# Altium PCB 声音传感器.PcbDoc
Units mm, origin at the board's own origin, x right, y up, seen from the top; angles counter-clockwise.
Board outline 152.4 x 101.6 mm, 2 copper layers (Top Layer, Bottom Layer); 14 components, 8 nets, 41 pads, 3 vias.
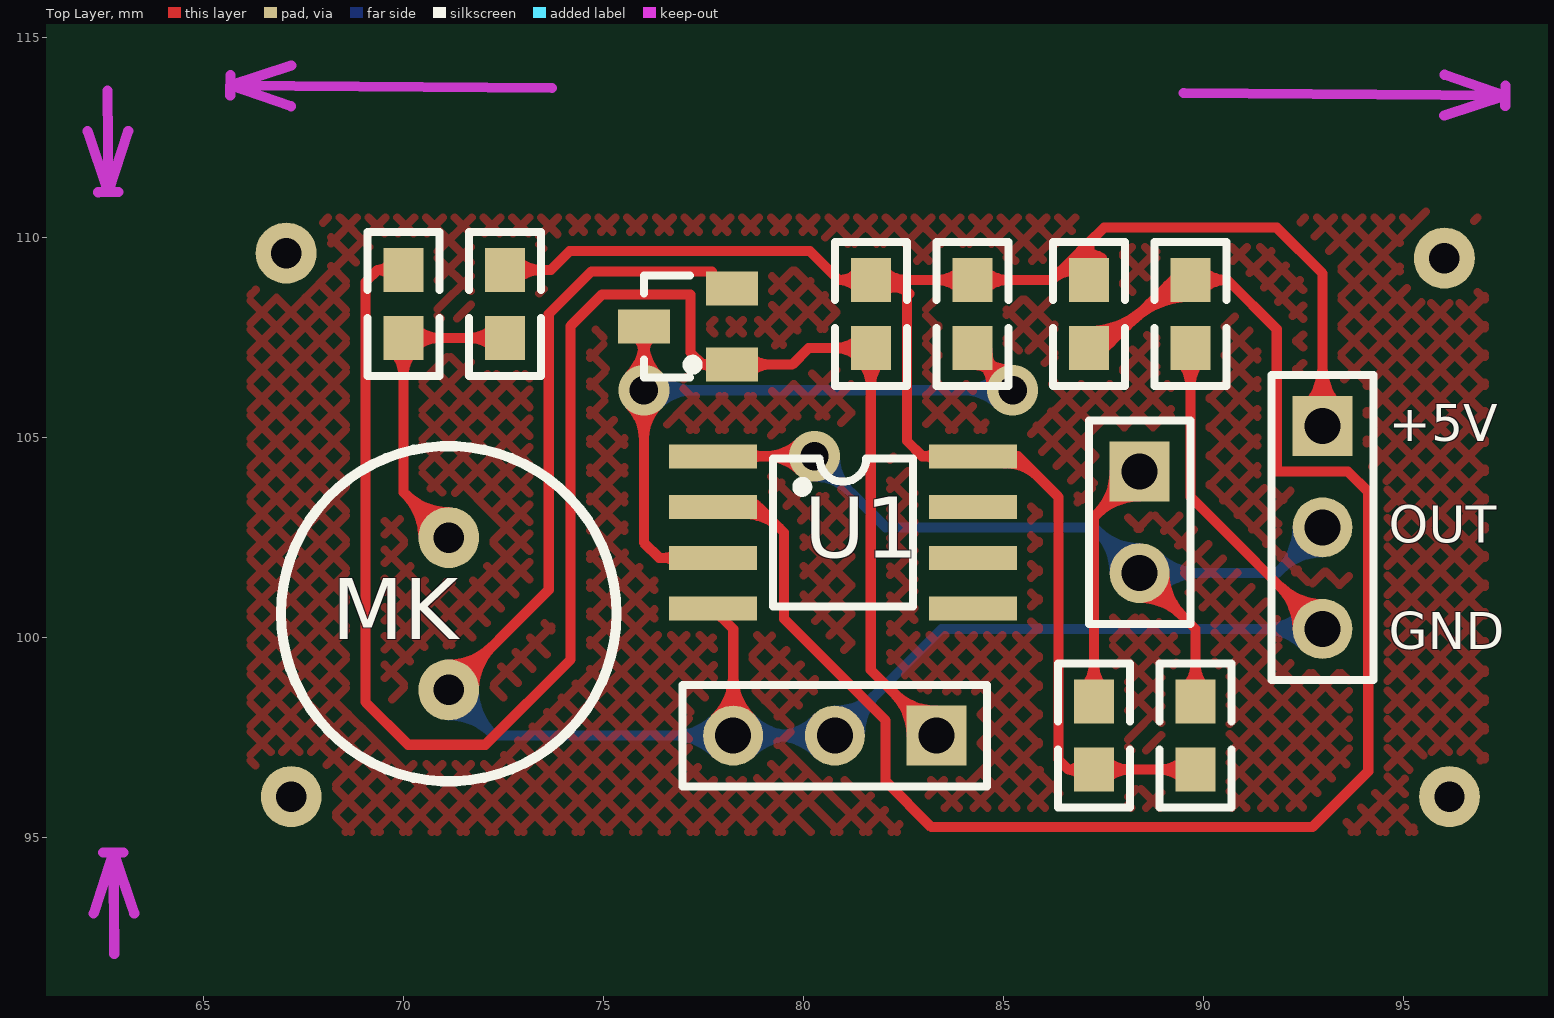
[diagram p0: Top Layer view]
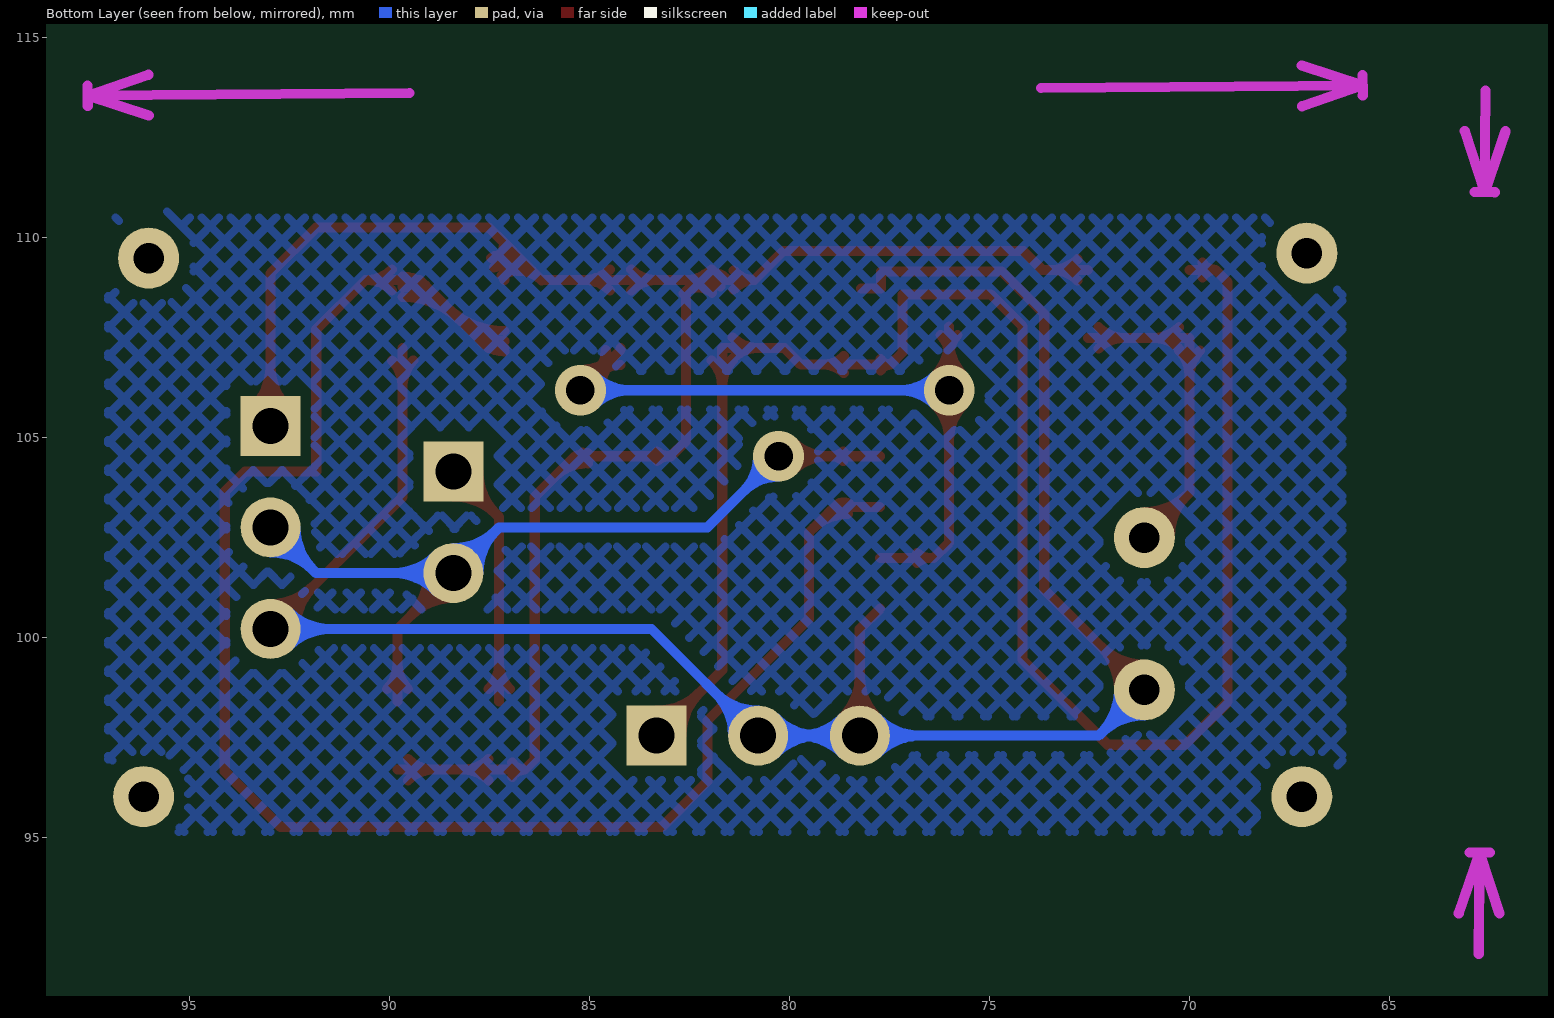
[diagram p1: Bottom Layer view, seen from below]

## Layer stack, top to bottom
Top Layer: signal copper 0.0356
Dielectric: dielectric 0.32, FR-4, Dk 4.8
Bottom Layer: signal copper 0.0356

## Board outline
25.4,25.4 177.8,25.4 177.8,127 25.4,127

## Design rules (kind name [scope] priority, off if disabled: settings)
Clearance [All] p1: gap=0.254
ComponentClearance [All] p1: gap=0.254 collisioncheckmode=3 verticalgap=0.254
PolygonConnect [All] p1: connectstyle=Relief reliefconductorwidth=0.254 reliefentries=4 polygonreliefangle="90 Angle"
RoutingVias [All] p1: holewidth=0.711 width=1.27 viastyle="Through Hole" minholewidth=0.711 minwidth=1.27 maxholewidth=0.711 maxwidth=1.27
SolderMaskExpansion [All] p1: expansion=0.102
TestPointUsage [All] p1: valid=0 allowmultiple=FALSE
Testpoint [All] p1: side=15 testpointundercomponent=TRUE minsize=1.016 maxsize=2.54 preferedsize=1.524 minholesize=0 maxholesize=1.016 preferedholesize=0.813 testpointgrid=0.025 style=1023 order=0-112345678
Width [All] p1: maxlimit=0.254 minlimit=0.254 preferedwidth=0.254
17 further rules are at their usual default settings.

## Classes and differential pairs
component class 声音传感器: +5V MK U1 ""

## Components (designator, comment, footprint, x,y, rotation, side; value= is the part's Value field where it differs from the comment)
+5V "Header 3" HDR1X3 92.964,105.283 r270 top (schematic designator JP1)
C1 "" C1608-0603 69.988,108.331 r90 top
LED1 "" HDR1X2 88.392,104.14 r270 top
MK "" MK 66.04,108.204 r270 top
Q1 "NPN" SO-G3 77.216,108.712 r90 top
R1 "" C1608-0603 72.528,108.331 r90 top
R2 "" C1608-0603 81.672,108.077 r90 top
R3 "" C1608-0603 84.212,108.077 r90 top
R4 "" C1608-0603 87.122,108.077 r90 top
R5 "" C1608-0603 89.662,108.077 r90 top
R6 "" C1608-0603 89.789,97.536 r90 top
R7 "" C1608-0603 87.249,97.536 r90 top
Rp "" HDR1X3 83.312,97.536 r180 top
U1 "LM393AD" CDFP-8 77.216,100.076 r270 top

## Footprints (in the part's own frame and the unit in brackets; to place one, negate y for a bottom-side part, rotate by r counter-clockwise, add the part's x,y. Pads: shape width x height; smd on the part's side, far side on the other; paste and mask are expansions set on the pad)
C1608-0603 [mm] "Chip Resistor; Body 1.6 x 0.8 mm (LxW typ)"
  rect 1.1x1 smd: 1(-0.85,0) 2(0.85,0)
  silkscreen extent -1.8,-0.9 1.8,0.9
CDFP-8 [mm]
  rect 0.6x2.2 smd: 1(-4.445,0.508) 2(-3.175,0.508) 3(-1.905,0.508) 4(-0.635,0.508) 5(-0.635,7.008) 6(-1.905,7.008) 7(-3.175,7.008) 8(-4.445,7.008)
  silkscreen extent -4.39,2.01 -0.69,5.51
HDR1X2 [mm] "Connector; Header; 2 Position"
  rect 1.5x1.5 hole 0.9: 1(0,0)
  round 1.5 hole 0.9: 2(2.54,0)
  silkscreen extent -1.27,-1.27 3.81,1.27
HDR1X3 [mm] "Connector; Header; 3 Position"
  rect 1.5x1.5 hole 0.9: 1(0,0)
  round 1.5 hole 0.9: 2(2.54,0) 3(5.08,0)
  silkscreen extent -1.27,-1.27 6.35,1.27
MK [mil]
  round 60 hole 30: 1(225,200) 2(375,200)
  silkscreen extent 135,35 465,365
SO-G3 [mm] "SOT-23; 3 Leads; Body 3.0 x 2.6 mm, inc. leads (LxW max)"
  rect 0.85x1.3 smd: 1(-1.9,-0.983) 2(0,-0.983) 3(-0.95,1.217)
  silkscreen extent -2.23,-0.13 0.32,1.22

## Part data
+5V: "Header, 3-Pin"
C1: library part "Cap Semi", "Capacitor (Semiconductor SIM Model)"
LED1: library part LED3, "Typical BLUE SiC LED"
MK: library part Motor, "Motor, General Kind"
Q1: "NPN Bipolar Transistor"
R1 R2 R3 R4 R5 R6 R7: library part Res2, "Resistor"
Rp: library part RPot, "Potentiometer"
U1: "Low-Power Dual Voltage Comparator"

## Free pads (board coordinates)
  round 1.524 hole 0.762: 3(67.056,109.601) 4(67.183,96.012) 5(96.012,109.474) 6(96.139,96.012)

## Via types
v1: diameter 1.27, hole 0.711, Top Layer to Bottom Layer, 3 vias

## Nets (pads, with @x,y where several pads share a name; then routed paths per layer and width w, separated by ;. In a path a pad name is that pad's centre, name@x,y a point inside that pad or via, vN(x,y) a via of type N, cw(c..) or ccw(c..) an arc to the next point about the centre after c; other vN are vias at no path point)
GND: +5V.3 MK.2 Q1.2 R5.1 Rp.2 Rp.3 U1.4 | length 86.5
  Top Layer w0.254: MK.2 73.622,101.181 73.622,108.077 74.688,109.144 77.699,109.144 77.699,108.712 Q1.2 ; MK.2@71.12,99.06 ccw(c71.12,99.98) 71.77,99.329 ccw(c72.421,98.679) MK.2@71.501,98.679 ; MK.2@71.12,99.314 ccw(c71.12,100.847) 72.204,99.763 ccw(c73.288,98.679) MK.2@71.755,98.679 ; U1.4 78.232,100.203 Rp.3 ; Rp.3@77.791,97.977 ccw(c76.728,99.04) 78.232,99.04 ccw(c79.736,99.04) Rp.3@78.673,97.977 ; Rp.3@77.971,97.797 ccw(c77.341,98.427) 78.232,98.427 ccw(c79.123,98.427) Rp.3@78.493,97.797 ; R5.1@89.398,106.913 cw(c88.762,106.277) 89.662,106.277 cw(c90.562,106.277) R5.1@89.926,106.913 ; R5.1 89.662,103.505 +5V.3 ; +5V.3@92.341,100.203 ccw(c90.837,100.203) 91.9,101.267 ccw(c92.964,102.33) +5V.3@92.964,100.826 ; +5V.3@92.595,100.203 ccw(c91.704,100.203) 92.334,100.833 ccw(c92.964,101.463) +5V.3@92.964,100.572
  Bottom Layer w0.254: MK.2@71.12,98.044 cw(c71.12,96.511) 72.204,97.595 cw(c73.288,98.679) MK.2@71.755,98.679 ; MK.2@71.12,98.298 cw(c71.12,97.378) 71.77,98.029 cw(c72.421,98.679) MK.2@71.501,98.679 ; MK.2 72.263,97.536 Rp.3 Rp.2 83.439,100.203 +5V.3 ; Rp.3@77.791,97.095 ccw(c76.728,96.032) 76.728,97.536 ccw(c76.728,99.04) Rp.3@77.791,97.977 ; Rp.3@77.971,97.275 ccw(c77.341,96.645) 77.341,97.536 ccw(c77.341,98.427) Rp.3@77.971,97.797 ; Rp.3@78.493,97.275 cw(c79.123,96.645) 79.123,97.536 cw(c79.123,98.427) Rp.3@78.493,97.797 ; Rp.3@78.673,97.095 cw(c79.736,96.032) 79.736,97.536 cw(c79.736,99.04) Rp.3@78.673,97.977 ; Rp.2@80.331,97.095 ccw(c79.268,96.032) 79.268,97.536 ccw(c79.268,99.04) Rp.2@80.331,97.977 ; Rp.2@80.511,97.275 ccw(c79.881,96.645) 79.881,97.536 ccw(c79.881,98.427) Rp.2@80.511,97.797 ; Rp.2@80.772,97.905 ccw(c80.772,98.796) 81.402,98.166 ccw(c82.032,97.536) Rp.2@81.141,97.536 ; Rp.2@80.772,98.159 ccw(c80.772,99.663) 81.836,98.6 ccw(c82.899,97.536) Rp.2@81.395,97.536 ; +5V.3@92.523,99.762 ccw(c91.46,98.699) 91.46,100.203 ccw(c91.46,101.707) +5V.3@92.523,100.644 ; +5V.3@92.703,99.942 ccw(c92.073,99.312) 92.073,100.203 ccw(c92.073,101.094) +5V.3@92.703,100.464
NetC1_1: C1.1 MK.1 R1.1 | length 16.1
  Top Layer w0.254: C1.1@69.724,107.167 cw(c69.088,106.531) 69.988,106.531 cw(c70.889,106.531) C1.1@70.252,107.167 ; C1.1@70.252,107.217 cw(c70.889,106.581) 70.889,107.481 cw(c70.889,108.382) C1.1@70.252,107.745 ; MK.1@70.485,102.489 ccw(c68.952,102.489) 70.036,103.573 ccw(c71.12,104.657) MK.1@71.12,103.124 ; MK.1@70.739,102.489 ccw(c69.819,102.489) 70.47,103.139 ccw(c71.12,103.79) MK.1@71.12,102.87 ; MK.1 69.988,103.621 C1.1 R1.1 ; R1.1@72.264,107.217 ccw(c71.628,106.581) 71.628,107.481 ccw(c71.628,108.382) R1.1@72.264,107.745
NetC1_2: C1.2 Q1.1 R2.1 Rp.1 | length 55.4
  Top Layer w0.254: C1.2@69.665,108.995 ccw(c69.342,108.808) 69.342,109.181 ; C1.2@69.665,109.367 cw(c69.342,109.554) 69.342,109.181 ; C1.2 69.342,109.181 ; Q1.1@77.713,106.668 ccw(c77.47,106.535) 77.47,106.812 ; Q1.1@77.713,106.955 cw(c77.47,107.089) 77.47,106.812 ; Q1.1@78.635,106.601 cw(c79.143,106.092) 79.143,106.812 cw(c79.143,107.531) Q1.1@78.635,107.022 ; R2.1@81.408,106.913 cw(c80.772,106.277) 81.672,106.277 cw(c82.573,106.277) R2.1@81.936,106.913 ; R2.1@81.408,106.963 ccw(c80.772,106.327) 80.772,107.227 ccw(c80.772,108.128) R2.1@81.408,107.491 ; Rp.1@82.689,97.536 ccw(c81.185,97.536) 82.248,98.6 ccw(c83.312,99.663) Rp.1@83.312,98.159 ; Rp.1@82.943,97.536 ccw(c82.052,97.536) 82.682,98.166 ccw(c83.312,98.796) Rp.1@83.312,97.905 ; Rp.1 81.672,99.176 R2.1 80.12,107.227 79.705,106.812 Q1.1 77.47,106.812 ; 69.342,109.181 69.037,108.876 69.037,98.374 70.104,97.307 72.034,97.307 74.168,99.441 74.168,107.781 74.955,108.569 77.165,108.569 77.165,107.117 77.47,106.812
NetJP1_2: +5V.2 LED1.2 R6.2 U1.1 | length 41.7
  Top Layer w0.254: U1.1 v1(80.264,104.521) ; U1.1@78.646,104.399 cw(c78.942,104.103) 78.942,104.521 cw(c78.942,104.939) U1.1@78.646,104.643 ; v1@79.905,104.162 ccw(c79.038,103.295) 79.038,104.521 ccw(c79.038,105.747) v1@79.905,104.88 ; LED1.2@88.392,100.977 cw(c88.392,99.473) 89.456,100.536 cw(c90.519,101.6) LED1.2@89.015,101.6 ; LED1.2@88.392,101.231 cw(c88.392,100.34) 89.022,100.97 cw(c89.652,101.6) LED1.2@88.761,101.6 ; LED1.2 89.789,100.203 R6.2 ; R6.2@89.525,98.7 ccw(c88.889,99.336) 89.789,99.336 ccw(c90.689,99.336) R6.2@90.053,98.7
  Bottom Layer w0.254: v1@80.264,104.013 cw(c80.264,102.787) 81.131,103.654 cw(c81.998,104.521) v1@80.772,104.521 ; v1(80.264,104.521) 82.042,102.743 87.249,102.743 LED1.2 91.821,101.6 +5V.2 ; LED1.2@87.769,101.6 ccw(c86.265,101.6) 87.328,102.664 ccw(c88.392,103.727) LED1.2@88.392,102.223 ; LED1.2@88.023,101.6 ccw(c87.132,101.6) 87.762,102.23 ccw(c88.392,102.86) LED1.2@88.392,101.969 ; LED1.2@88.653,101.339 cw(c89.283,100.709) 89.283,101.6 cw(c89.283,102.491) LED1.2@88.653,101.861 ; LED1.2@88.833,101.159 cw(c89.896,100.096) 89.896,101.6 cw(c89.896,103.104) LED1.2@88.833,102.041 ; +5V.2@92.341,102.743 cw(c90.837,102.743) 91.9,101.679 cw(c92.964,100.616) +5V.2@92.964,102.12 ; +5V.2@92.595,102.743 cw(c91.704,102.743) 92.334,102.113 cw(c92.964,101.483) +5V.2@92.964,102.374
NetLED1_1: LED1.1 R7.2 | length 11.4
  Top Layer w0.254: R7.2@86.985,98.7 ccw(c86.349,99.336) 87.249,99.336 ccw(c88.149,99.336) R7.2@87.513,98.7 ; R7.2 87.249,102.997 LED1.1 ; LED1.1@87.769,104.14 cw(c86.265,104.14) 87.328,103.076 cw(c88.392,102.013) LED1.1@88.392,103.517 ; LED1.1@88.023,104.14 cw(c87.132,104.14) 87.762,103.51 cw(c88.392,102.88) LED1.1@88.392,103.771
NetQ1_3: Q1.3 R3.1 U1.3 | length 30.8
  Top Layer w0.254: v1@75.64,105.813 cw(c74.772,104.946) 75.999,104.946 cw(c77.225,104.946) v1@76.358,105.813 ; v1@75.64,106.531 ccw(c74.772,107.398) 75.999,107.398 ccw(c77.225,107.398) v1@76.358,106.531 ; Q1.3@75.788,107.551 cw(c75.279,107.042) 75.999,107.042 cw(c76.718,107.042) Q1.3@76.21,107.551 ; Q1.3 v1(75.999,106.172) 75.999,102.362 76.38,101.981 U1.3 ; U1.3@76.802,101.859 ccw(c76.506,101.563) 76.506,101.981 ccw(c76.506,102.399) U1.3@76.802,102.103 ; R3.1@84.212,106.804 cw(c84.212,105.904) 84.849,106.54 cw(c85.486,107.177) R3.1@84.585,107.177 ; R3.1 84.212,107.177 v1(85.217,106.172) ; v1@84.709,106.172 ccw(c83.483,106.172) 84.35,107.039 ccw(c85.217,107.906) v1@85.217,106.68
  Bottom Layer w0.254: v1(75.999,106.172) v1(85.217,106.172) ; v1@76.358,105.813 cw(c77.225,104.946) 77.225,106.172 cw(c77.225,107.398) v1@76.358,106.531 ; v1@84.858,105.813 ccw(c83.991,104.946) 83.991,106.172 ccw(c83.991,107.398) v1@84.858,106.531
NetR4_1: R4.1 R5.2 U1.2 | length 52.3
  Top Layer w0.254: U1.2 78.867,103.251 ; U1.2@78.476,103.316 cw(c78.637,103.097) 78.829,103.289 ; U1.2@78.524,103.078 cw(c78.524,101.832) 79.405,102.713 ; U1.2@78.524,103.332 cw(c78.524,102.699) 78.971,103.147 ; U1.2@78.626,103.111 cw(c78.814,102.855) 79.038,103.08 ; U1.2@78.663,103.148 cw(c78.867,102.998) 78.867,103.251 ; U1.2@78.663,103.354 ccw(c78.867,103.504) 78.867,103.251 ; R4.1@87.122,107.142 ccw(c87.122,107.918) 87.671,107.369 ; R4.1 87.528,107.227 89.228,108.927 R5.2 90.59,108.927 91.821,107.696 91.821,104.14 93.599,104.14 94.107,103.632 94.107,96.647 92.71,95.25 83.185,95.25 82.042,96.393 82.042,97.917 79.502,100.457 79.502,102.616 78.867,103.251 ; R4.1@87.122,107.396 ccw(c87.122,108.785) 88.104,107.803 ; R4.1@87.122,107.65 ccw(c87.122,109.652) 88.538,108.236 ; 88.2,107.898 cw(c89.662,106.436) R5.2@89.662,108.504 ; 88.633,108.332 cw(c89.662,107.303) R5.2@89.662,108.758 ; 89.067,108.765 cw(c89.662,108.17) R5.2@89.662,109.012 ; R5.2@89.926,108.663 cw(c90.562,108.026) 90.562,108.927 cw(c90.562,109.827) R5.2@89.926,109.191
VCC: +5V.1 R1.2 R2.2 R3.2 R4.2 R6.1 R7.1 U1.8 | length 72.2
  Top Layer w0.254: R1.2 73.675,109.181 74.146,109.652 80.144,109.652 80.868,108.927 ; R1.2@72.792,108.917 cw(c73.429,108.28) 73.429,109.181 cw(c73.429,110.081) R1.2@72.792,109.445 ; R2.2@81.387,108.686 ccw(c80.869,108.248) 80.869,108.927 ; R2.2@81.387,109.168 cw(c80.869,109.606) 80.869,108.927 ; R2.2@81.58,108.976 cw(c81.913,108.617) 82.26,108.963 ; R2.2@81.621,109.002 cw(c81.883,108.361) 82.372,108.851 ; R2.2@81.717,108.767 cw(c82.04,107.978) 82.642,108.581 ; R2.2@81.753,108.79 cw(c82.093,108.423) 82.446,108.777 ; R2.2@81.926,108.603 cw(c82.272,108.229) 82.633,108.59 ; R2.2@81.936,108.663 cw(c82.573,108.026) 82.573,108.927 cw(c82.573,109.827) R2.2@81.936,109.191 ; U1.8@83.302,104.399 ccw(c83.006,104.103) 83.006,104.521 ccw(c83.006,104.939) U1.8@83.302,104.643 ; R3.2@83.948,108.663 ccw(c83.312,108.026) 83.312,108.927 ccw(c83.312,109.827) R3.2@83.948,109.191 ; R3.2@84.476,108.663 cw(c85.113,108.026) 85.113,108.927 cw(c85.113,109.827) R3.2@84.476,109.191 ; U1.8@85.024,104.348 cw(c85.024,103.158) 85.866,103.999 ; U1.8@85.024,104.602 cw(c85.024,104.025) 85.432,104.433 ; U1.8@85.13,104.384 cw(c85.304,104.161) 85.504,104.361 ; U1.8@85.169,104.426 cw(c85.344,104.312) 85.344,104.521 ; U1.8@85.169,104.616 ccw(c85.344,104.73) 85.344,104.521 ; 86.188,108.921 cw(c86.767,108.342) R4.2@87.192,109.042 ; 86.417,109.15 cw(c86.94,108.627) R4.2@87.324,109.26 ; R4.2@86.646,109.379 cw(c87.113,108.912) R4.2@87.455,109.477 ; R4.2@86.863,109.245 ccw(c86.275,109.855) 87.122,109.855 ; R7.1@86.923,96.504 ccw(c86.614,96.332) 86.614,96.686 ; R7.1@86.923,96.868 cw(c86.614,97.04) 86.614,96.686 ; R4.2 87.122,109.855 ; R4.2@87.381,109.245 cw(c87.969,109.855) 87.122,109.855 ; R7.1@87.513,96.422 cw(c88.149,95.786) 88.149,96.686 cw(c88.149,97.587) R7.1@87.513,96.95 ; R6.1@89.525,96.422 ccw(c88.889,95.786) 88.889,96.686 ccw(c88.889,97.587) R6.1@89.525,96.95 ; R6.1 R7.1 86.614,96.686 ; +5V.1@92.523,105.724 ccw(c91.46,106.787) 92.964,106.787 ccw(c94.468,106.787) +5V.1@93.405,105.724 ; +5V.1@92.703,105.544 ccw(c92.073,106.174) 92.964,106.174 ccw(c93.855,106.174) +5V.1@93.225,105.544 ; +5V.1 92.964,109.093 91.821,110.236 87.503,110.236 87.122,109.855 ; 80.868,108.927 R2.2 82.296,108.927 ; 82.296,108.927 cw(c82.296,109.262) 82.001,109.104 ccw(c82.296,109.262) 82.296,108.927 ; 82.296,108.927 ccw(c82.296,108.592) 82.001,108.75 cw(c82.296,108.592) 82.296,108.927 ; 82.296,108.927 82.575,108.648 82.575,104.902 82.956,104.521 U1.8 85.344,104.521 ; 82.296,108.927 R3.2 86.194,108.927 86.658,109.391 87.122,109.855 ; 85.344,104.521 86.36,103.505 86.36,96.94 86.614,96.686
pads on no net: U1.5 U1.6 U1.7

## Polygon pours and split planes (outlines as drawn)
no net on Top Layer (hatched 45Degree grid 0.508 track 0.203): 66.167,110.49 66.167,95.123 97.028,95.123 97.028,110.49
no net on Bottom Layer (hatched 45Degree grid 0.508 track 0.203): 66.167,110.49 66.167,95.123 97.028,95.123 97.028,110.49

## Keep-outs
Keep-Out Layer:
  lines w0.254: 62.091,112.645 62.611,111.125 ; 62.242,93.087 62.738,94.615 ; 62.357,111.123 62.865,111.127 ; 62.484,94.613 62.992,94.617 ; 62.591,113.665 62.611,111.125 ; 62.758,92.075 62.738,94.615 ; 63.107,112.653 62.611,111.125 ; 63.258,93.095 62.738,94.615 ; 65.657,113.538 65.661,114.046 ; 67.179,113.272 65.659,113.792 ; 67.187,114.288 65.659,113.792 ; 73.701,113.728 65.659,113.792 ; 89.494,113.602 97.536,113.538 ; 96.008,113.042 97.536,113.538 ; 96.016,114.058 97.536,113.538 ; 97.534,113.284 97.538,113.792
  text "31.878 (mm)" at 73.947,112.812 h1.52 r359.54
  text "16.5105 (mm)" at 58.954,111.119 h1.52 r270.44

## Silkscreen, mask and mechanical layers (free items; w line width, h text height)
Top Overlay:
  text "OUT" at 94.615,102.362 h0.92
  text "GND" at 94.615,99.695 h0.92
Mechanical 1:
  lines w0.254: 65.659,94.488 65.659,110.998 97.536,110.998 97.536,94.615 65.659,94.615